# Altium PCB SD.PcbDoc
Units mil, origin at the board's own origin, x right, y up, seen from the top; angles counter-clockwise.
Board outline 6000 x 4000 mil, 2 copper layers (Top Layer, Bottom Layer); 7 components, 7 nets, 33 pads, 0 vias.
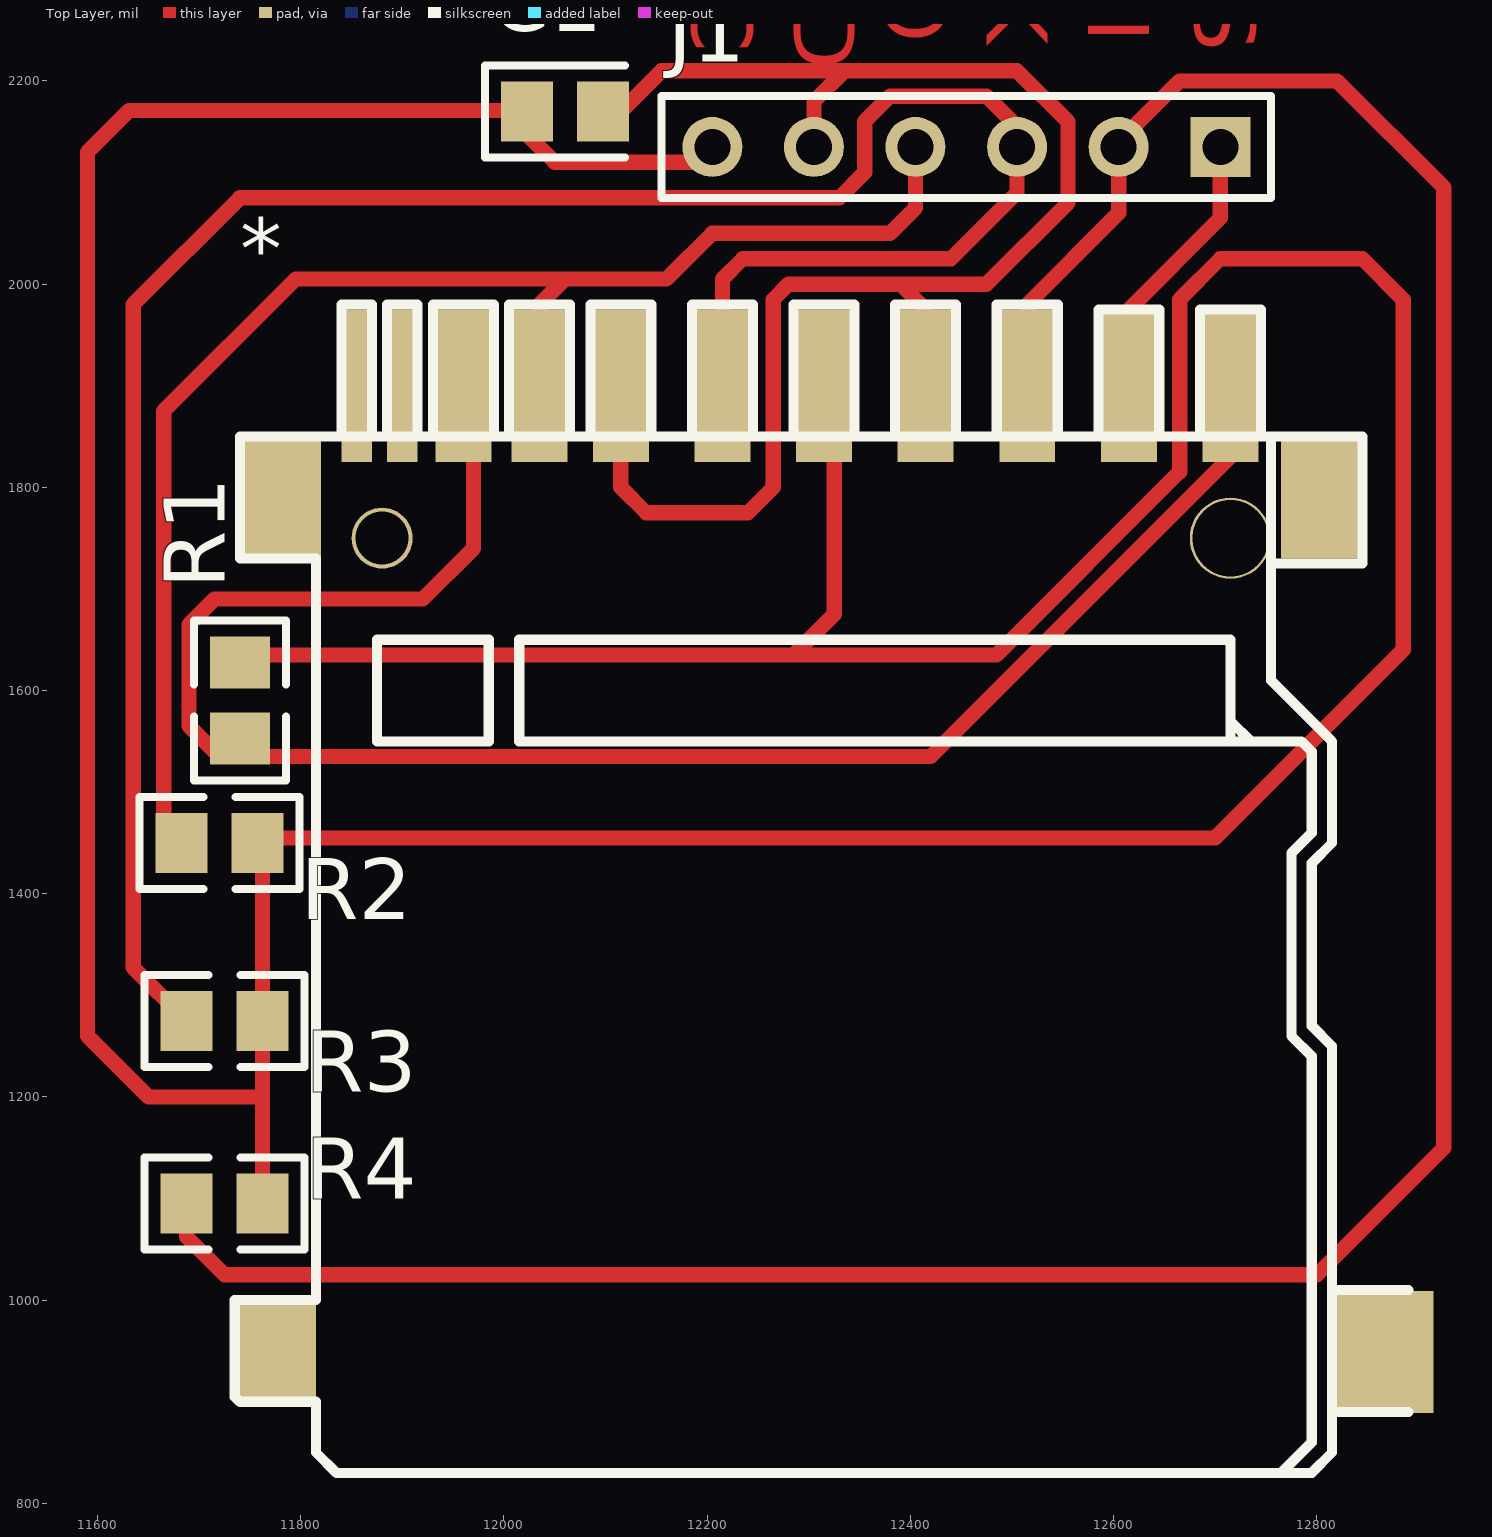
[diagram p0: Top Layer view]
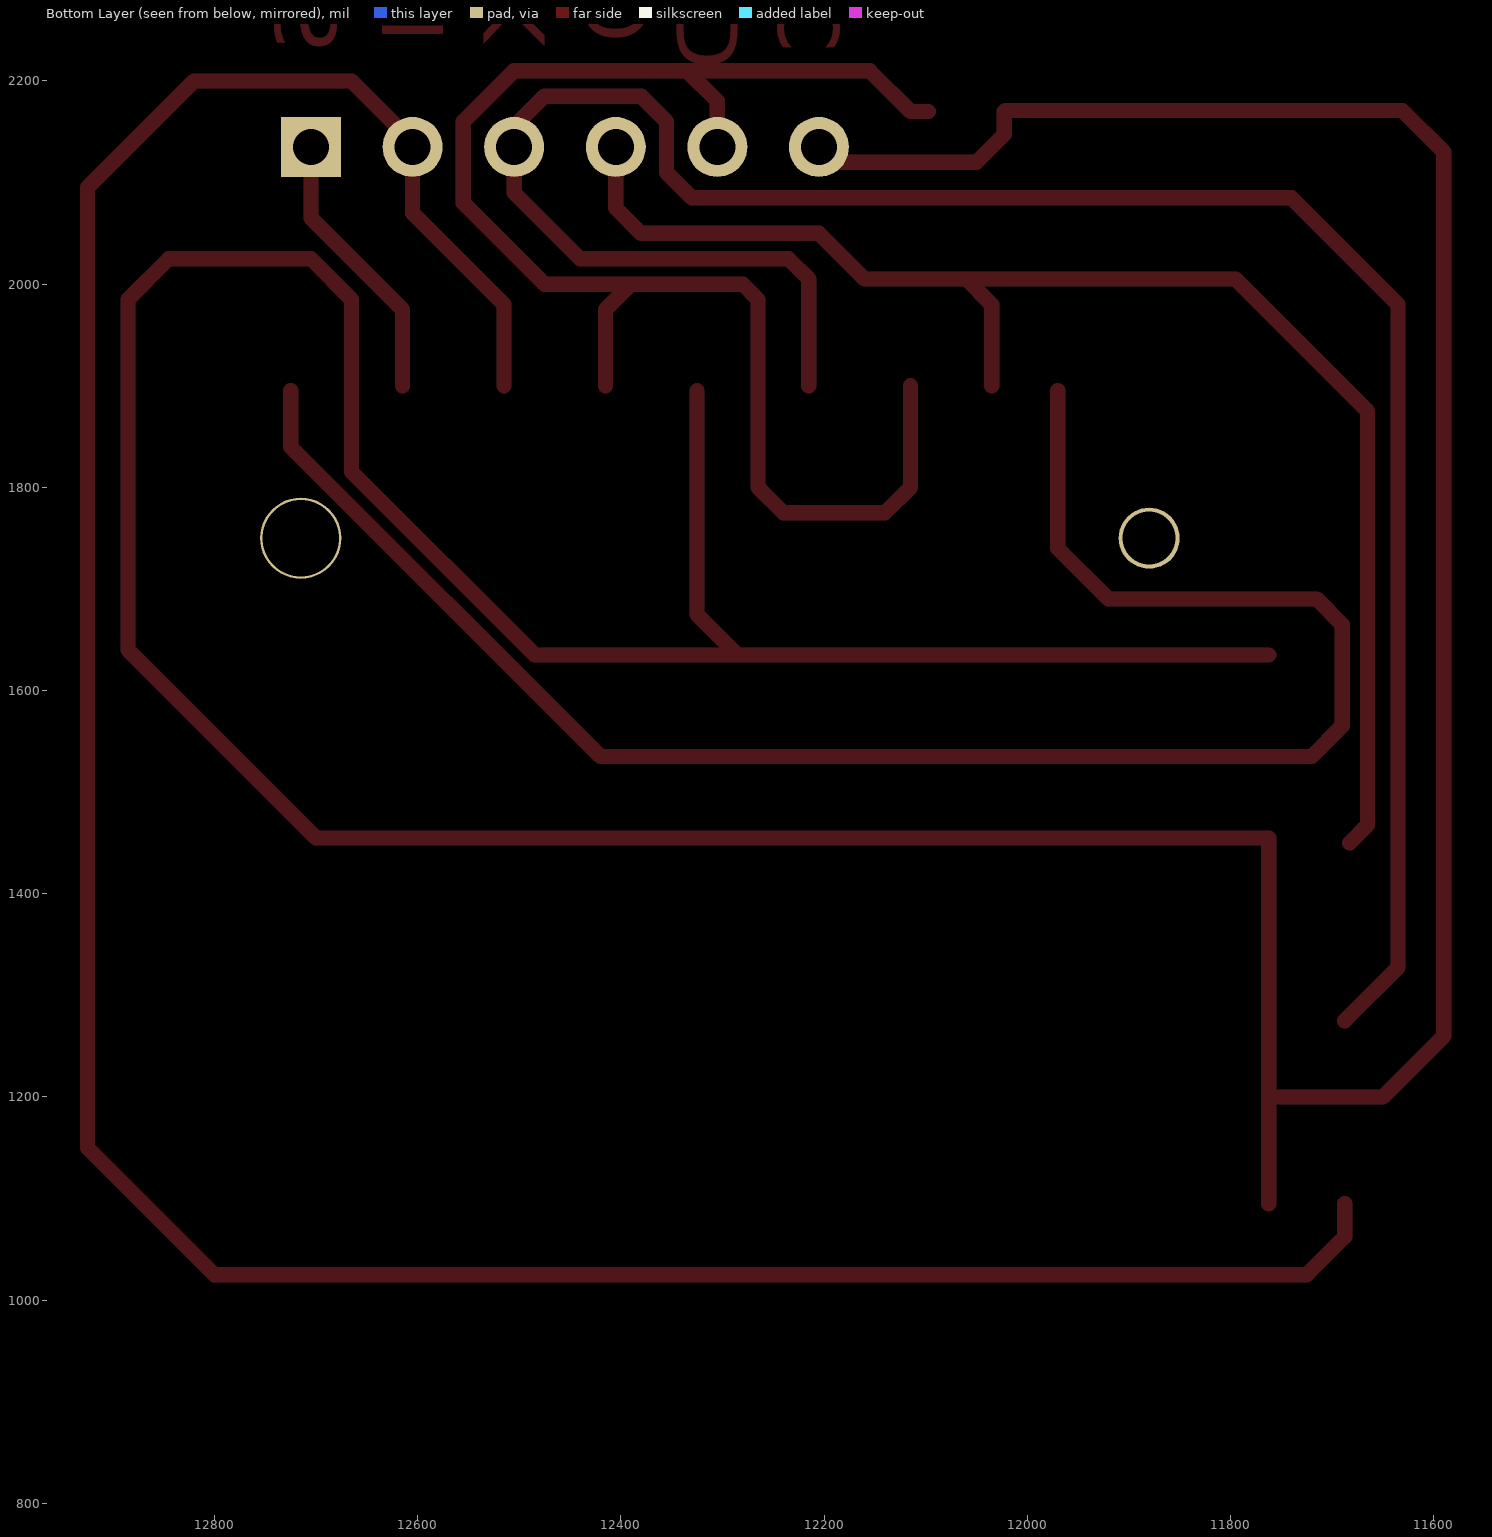
[diagram p1: Bottom Layer view, seen from below]

## Layer stack, top to bottom
Top Layer: signal copper 1.4
Dielectric: dielectric 12.6, FR-4, Dk 4.8
Bottom Layer: signal copper 1.4

## Board outline
1000,1000 7000,1000 7000,5000 1000,5000

## Design rules (kind name [scope] priority, off if disabled: settings)
Clearance [All] p1: gap=10
ComponentClearance [All] p1: gap=10 collisioncheckmode=0
PolygonConnect [All] p1: connectstyle=Relief reliefconductorwidth=10 reliefentries=4 polygonreliefangle="90 Angle"
RoomDefinition SD [InComponentClass('SD')] p1: confinementstyle=ConfineIn formatcopy=TRUE outline 11495,775 13070,775 13070,2530 11495,2530
RoutingLayers [All] p1: top layer=Horizontal bottom layer="Not Used"
RoutingVias [All] p1: holewidth=28 width=50 viastyle="Through Hole" minholewidth=28 minwidth=50 maxholewidth=28 maxwidth=50
SolderMaskExpansion [All] p1: expansion=4
TestPointUsage [All] p1: valid=0 allowmultiple=FALSE
Testpoint [All] p1: side=15 testpointundercomponent=TRUE minsize=40 maxsize=100 preferedsize=60 minholesize=0 maxholesize=40 preferedholesize=32 testpointgrid=1 style=1023 order=-539222988
Width [All] p1: maxlimit=20 minlimit=10 preferedwidth=10 toplayer_prefwidth=15 bottomlayer_prefwidth=15 minimp=50.000000 maximp=50.000000 favimp=50.000000
16 further rules are at their usual default settings.

## Components (designator, comment, footprint, x,y, rotation, side; value= is the part's Value field where it differs from the comment)
* "SDcard" SDcard 41380,30650 r0 top
C1 "Cap Pol3" CC2012-0805 12060,2170 r0 top
J1 "Header 6" HDR1X6 12705,2135 r180 top
R1 "Res3" R2012-0805 11740,1590 r90 top
R2 "Res3" R2012-0805 11720,1450 r180 top
R3 "Res3" R2012-0805 11725,1275 r180 top
R4 "Res3" R2012-0805 11725,1095 r180 top

## Footprints (in the part's own frame and the unit in brackets; to place one, negate y for a bottom-side part, rotate by r counter-clockwise, add the part's x,y. Pads: shape width x height; smd on the part's side, far side on the other; paste and mask are expansions set on the pad)
CC2012-0805 [mm]
  rect 1.3x1.5 smd: 1(-0.95,0) 2(0.95,0)
  silkscreen extent -2,-1.15 1.5,1.15
HDR1X6 [mm] "Connector; Header; 6 Position"
  rect 1.5x1.5 hole 0.9: 1(0,0)
  round 1.5 hole 0.9: 2(2.54,0) 3(5.08,0) 4(7.62,0) 5(10.16,0) 6(12.7,0)
  silkscreen extent -1.27,-1.27 13.97,1.27
R2012-0805 [mm]
  rect 1.3x1.5 smd: 1(-0.95,0) 2(0.95,0)
  silkscreen extent -2,-1.15 2,1.15
SDcard [mil] "SDcard"
  rect 80x100 smd: 0(-29605,-29700)
  rect 80x120 smd: 0(-29600,-28860) 0(-28575,-28860)
  round 60 hole 52: 0(-29500,-28900)
  round 80 hole 75: 0(-28665,-28900)
  rect 100x120 smd: 0(-28515.37,-29700.84)
  rect 55x150 smd: 1(-28765,-28750) 2(-28865,-28750) 3(-28965,-28750) 4(-29065,-28750) 5(-29165,-28750) 6(-29265,-28750) 7(-29345,-28750) 8(-29420,-28750) 9(-28665,-28750)
  rect 30x150 smd: 10(-29480,-28750) 11(-29525,-28750)
  silkscreen extent -29645,-29820 -28490,-28670

## Part data
C1: "Polarized Capacitor (Surface Mount)"
J1: "Header, 6-Pin"
R1 R2 R3 R4: "Resistor"

## Nets (pads, with @x,y where several pads share a name; then routed paths per layer and width w, separated by ;. In a path a pad name is that pad's centre, name@x,y a point inside that pad or via, vN(x,y) a via of type N, cw(c..) or ccw(c..) an arc to the next point about the centre after c; other vN are vias at no path point)
Net*_1: *.1 J1.1 | length 272.3
  Top Layer w15: *.1 12615,1975 12705,2065 J1.1
Net*_2: *.2 J1.2 R4.2 | length 2947.9
  Top Layer w15: R4.2 11687.6,1062.4 11725,1025 12800,1025 12925,1150 12925,2095 12820,2200 12665,2200 12605,2140 12605,2070 12515,1980 *.2
Net*_3: *.3 *.6 C1.2 J1.5 | length 1557.7
  Top Layer w15: C1.2 12115,2170 12155,2210 12505,2210 12555,2160 12555,2080 12475,2000 12280,2000 12265,1985 12265,1800 12240,1775 12140,1775 12115,1800 *.6 ; J1.5 12305,2180 12335,2210 ; 12390,2000 12415,1975 *.3
Net*_4: *.4 C1.1 J1.6 R1.2 R2.1 R3.1 R4.1 | length 5320.6
  Top Layer w15: R4.1 11762.4,1455 12700,1455 12885,1640 12885,1985 12845,2025 12705,2025 12665,1985 12665,1815.36 12484.64,1635 R1.2@11762.4,1635 ; 11762.4,1200 11650,1200 11590,1260 11590,2130 11630.88,2170.88 12021.72,2170.88 C1.1 12022.6,2147.4 12050,2120 12190,2120 J1.6 ; 12285,1635 12325,1675 *.4@12325,1895
Net*_5: *.5 J1.3 R3.2 | length 2218.6
  Top Layer w15: R3.2 11635,1327.6 11635,1980 11740,2085 12330,2085 12355,2110 12355,2160 12380,2185 12475,2185 12505,2155 12505,2090 12440,2025 12235,2025 12215,2005 *.5
Net*_7: *.7 J1.4 R2.2 | length 1430.5
  Top Layer w15: R2.2 11665,1467.6 11665,1875 11795,2005 12160,2005 12205,2050 12380,2050 12405,2075 J1.4 ; *.7 12035,1980 12060,2005
Net*_8: *.8 *.9 R1.1 | length 1794.8
  Top Layer w15: *.8@11970,1895 11970,1740 11920,1690 11715,1690 11690,1665 11690,1565 11720,1535 12420,1535 12725,1840 *.9@12725,1895
pads on no net: *.0 *.10 *.11

## Other copper
Top Layer:
  text "SDCS" at 12680,2455 h60 r270
  text "MISO" at 12375,2450 h60 r270
  text "MOSI" at 12575,2450 h60 r270
  text "VCC" at 12185,2400 h60 r270
  text "GND" at 12285,2400 h60 r270
  text "SCK" at 12475,2400 h60 r270